# EAGLE board layout_da_pcb_fusion (EAGLE 9.7.0)
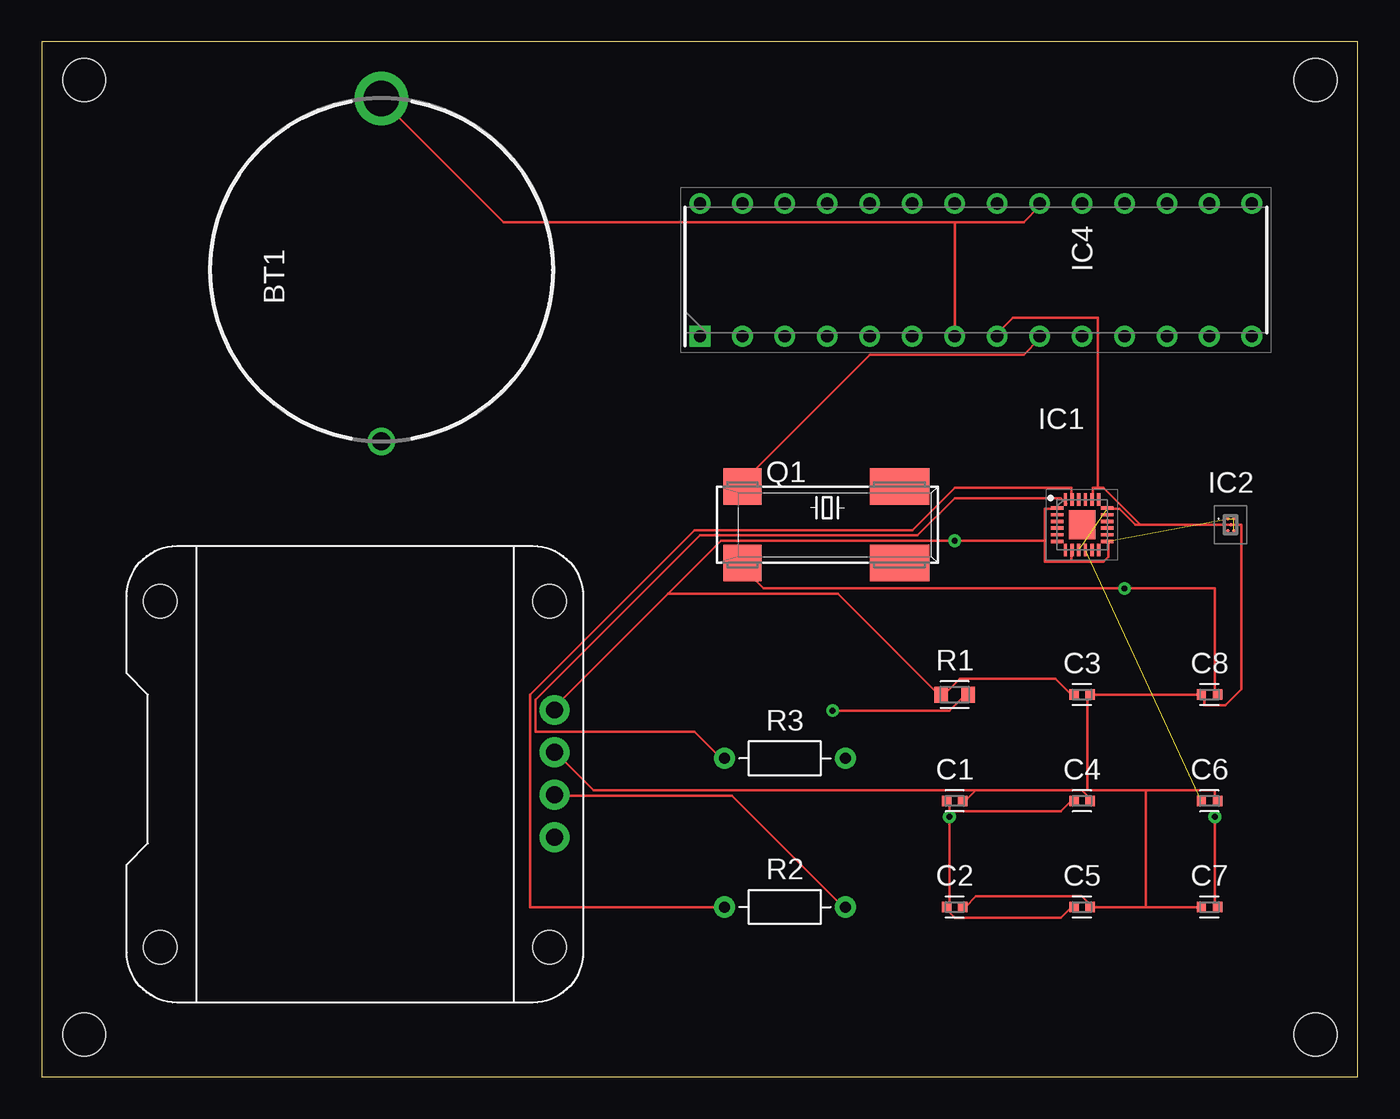
[diagram p0: board, top side]
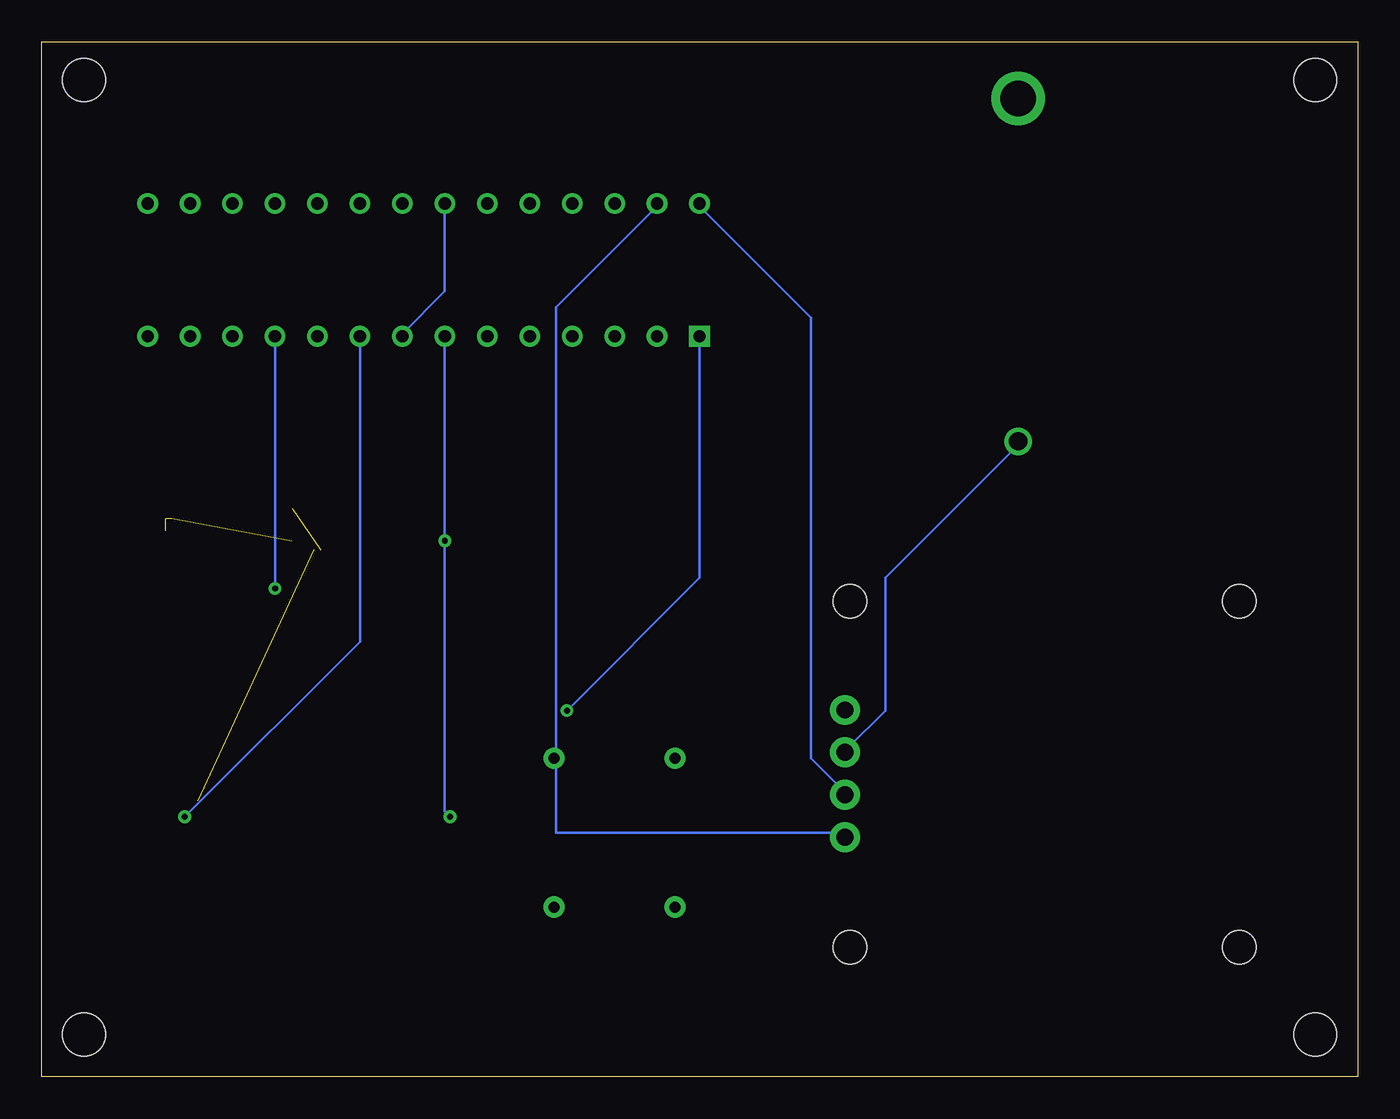
[diagram p1: board, bottom side, seen from below]

Size 78.72 x 61.9 mm. Coordinates in mm from the lower left corner, seen from the top.
Outline: 0,0 78.72,0 78.72,61.9 0,61.9 0,0
Copper layers (1*16): Top 0.035mm / dielectric 1.5mm / Bottom 0.035mm
Design rules "default": minimum track width 6mil, minimum drill 0.35mm, track to track 6mil, track to pad 6mil, pad to pad 6mil, via to via 6mil, smd to smd 6mil, copper to edge 40mil, drill to drill 6mil, minimum pad ring 10mil, minimum via ring 8mil, stop-mask expansion 4mil, vias tented up to drill 0mil, thermal gap 10mil
Holes 2.54 mm at 76.2,59.61 2.54,59.61 2.54,2.54 76.2,2.54

## Footprints (pad centres in the part's own frame; a part is rotated, then mirrored left to right if it is on the bottom)
CR-2032HFN = drill 1.09 pad 1.65: 1 -10.25,0 | drill 2.12 pad 3.2: 2 10.25,0
CAPC1005X60 = smd 0.56 x 0.629: 1 -0.485,0; 2 0.485,0
QFN40P300X300X105-25N = smd 0.75 x 0.2: 1 -1.5,1; 2 -1.5,0.6; 3 -1.5,0.2; 4 -1.5,-0.2; 5 -1.5,-0.6; 6 -1.5,-1; 13 1.5,-1; 14 1.5,-0.6; 15 1.5,-0.2; 16 1.5,0.2; 17 1.5,0.6; 18 1.5,1 | smd 0.2 x 0.75: 7 -1,-1.5; 8 -0.6,-1.5; 9 -0.2,-1.5; 10 0.2,-1.5; 11 0.6,-1.5; 12 1,-1.5; 19 1,1.5; 20 0.6,1.5; 21 0.2,1.5; 22 -0.2,1.5; 23 -0.6,1.5; 24 -1,1.5 | smd 1.59 x 1.75: 25 0,0
TPS7A1030PYKAR = smd 0.2 x 0.2: A1 -0.175,0.35; A3 0.175,0.35; B2 0,0; C1 -0.175,-0.35; C3 0.175,-0.35
DIP794W53P254L3467H457Q28N = drill 0.733 pad 1.133 square: 1 -3.969,16.51 | drill 0.733 pad 1.133: 2 -3.969,13.97; 3 -3.969,11.43; 4 -3.969,8.89; 5 -3.969,6.35; 6 -3.969,3.81; 7 -3.969,1.27; 8 -3.969,-1.27; 9 -3.969,-3.81; 10 -3.969,-6.35; 11 -3.969,-8.89; 12 -3.969,-11.43; 13 -3.969,-13.97; 14 -3.969,-16.51; 15 3.969,-16.51; 16 3.969,-13.97; 17 3.969,-11.43; 18 3.969,-8.89; 19 3.969,-6.35; 20 3.969,-3.81; 21 3.969,-1.27; 22 3.969,1.27; 23 3.969,3.81; 24 3.969,6.35; 25 3.969,8.89; 26 3.969,11.43; 27 3.969,13.97; 28 3.969,16.51
86SMX = smd 2.286 x 2.184: 1 -5.08,-2.286; 4 -5.08,2.286 | smd 3.556 x 2.184: 2 4.318,-2.286; 3 4.318,2.286
RESC1608X60 = smd 0.799 x 0.974: 1 -0.815,0; 2 0.815,0
RESAD724W46L381D178B = drill 0.66 pad 1.26: 1 -3.62,0; 2 3.62,0
OLED_0.96_I2C = drill 1 pad 1.778: GND -1.63,11.63; SCL 0.91,11.63; SDA 3.45,11.63; VCC -4.17,11.63 | hole 2: -10.67,-11.97; 10.03,-11.97; 10.03,11.33; -10.67,11.33

## Placement (x,y rotation side)
BT1  CR-2032_HFN  [CR-2032HFN]  20.32,48.26 90 top
C1  10 µF  [CAPC1005X60]  54.61,16.51 0 top
C2  0.1µF  [CAPC1005X60]  54.61,10.16 0 top
C3  4.7µF  [CAPC1005X60]  62.23,22.86 0 top
C4  0.01µF  [CAPC1005X60]  62.23,16.51 0 top
C5  0.1µF  [CAPC1005X60]  62.23,10.16 0 top
C6  0.1µF  [CAPC1005X60]  69.85,16.51 0 top
C7  22pF  [CAPC1005X60]  69.85,10.16 0 top
C8  22pF  [CAPC1005X60]  69.85,22.86 0 top
IC1  MPU-9250  [QFN40P300X300X105-25N]  62.23,33.02 0 top
IC2  TPS7A1030PYKAR  [TPS7A1030PYKAR]  71.12,33.02 0 top
IC4  ATMEGA328P-PU  [DIP794W53P254L3467H457Q28N]  55.88,48.26 90 top
Q1  16MHz  [86SMX]  46.99,33.02 0 top
R1  10KΩ  [RESC1608X60]  54.61,22.86 0 top
R2  10K  [RESAD724W46L381D178B]  44.45,10.16 0 top
R3  10K  [RESAD724W46L381D178B]  44.45,19.05 0 top
U$1  OLED_0.96_I2C  [OLED_0.96_I2C]  19.05,17.78 270 top

## Library data of the parts
BT1 = CR-2032_HFN; ARROW_PART_NUMBER: CR-2032/HFN; ARROW_PRICE-STOCK: https://www.arrow.com/en/products/cr-2032hfn/panasonic; DESCRIPTION: CR2032/1HF Non rechargeable Li coin cell Panasonic CR2032 3V Lithium Manganese Dioxide Coin Button Battery; HEIGHT: mm; MANUFACTURER_NAME: Panasonic; MANUFACTURER_PART_NUMBER: CR-2032/HFN; MOUSER_PART_NUMBER: 658-CR-2032/HFN; MOUSER_PRICE-STOCK: https://www.mouser.co.uk/ProductDetail/Panasonic-Battery/CR-2032-HFN?qs=w3%252Bcv6FlocpXdsVF%252BYgeww%3D%3D
C1-C8 = Capacitor; CATEGORY: Capacitor
IC1 = MPU-9250; ARROW_PART_NUMBER: MPU-9250; ARROW_PRICE-STOCK: https://www.arrow.com/en/products/mpu-9250/tdk; DESCRIPTION: Accelerometer, Gyroscope, Magnetometer, 3 Axis Sensor IC, SPI Output; HEIGHT: 1.05mm; MANUFACTURER_NAME: TDK; MANUFACTURER_PART_NUMBER: MPU-9250; MOUSER_PART_NUMBER: 410-MPU-9250; MOUSER_PRICE-STOCK: https://www.mouser.co.uk/ProductDetail/TDK-InvenSense/MPU-9250?qs=u4fy%2FsgLU9OhGjFkQSZssA%3D%3D
IC2 = LDO 3.3v; ARROW_PART_NUMBER: TPS7A1030PYKAR; ARROW_PRICE-STOCK: https://www.arrow.com/en/products/tps7a1030pykar/texas-instruments?region=nac; DESCRIPTION: 300-mA low-IQ ultra-low-dropout (LDO) (70 mV at 300 mA) linear regulator; HEIGHT: mm; MANUFACTURER_NAME: Texas Instruments; MANUFACTURER_PART_NUMBER: TPS7A1030PYKAR; MOUSER_PART_NUMBER: 595-TPS7A1030PYKAR; MOUSER_PRICE-STOCK: https://www.mouser.co.uk/ProductDetail/Texas-Instruments/TPS7A1030PYKAR?qs=gTYE2QTfZfS%252BOiFUcXGdIg%3D%3D
IC4 = ATMEGA328P-PU; ARROW_PART_NUMBER: ATMEGA328P-PU; ARROW_PRICE-STOCK: https://www.arrow.com/en/products/atmega328p-pu/microchip-technology?region=nac; DESCRIPTION: MICROCHIP - ATMEGA328P-PU. - MICROCONTROLLER MCU, 8 BIT, ATMEGA, 20MHZ, DIP-28; HEIGHT: 4.572mm; MANUFACTURER_NAME: Microchip; MANUFACTURER_PART_NUMBER: ATMEGA328P-PU; MOUSER_PART_NUMBER: 556-ATMEGA328P-PU; MOUSER_PRICE-STOCK: https://www.mouser.co.uk/ProductDetail/Microchip-Technology-Atmel/ATMEGA328P-PU?qs=K8BHR703ZXguOQv3sKbWcg%3D%3D
Q1 = crystal
R1-R3 = Resistor; CATEGORY: Resistor; SUB-CATEGORY: Fixed
U$1 = oled_autodesk

## Nets
GND: BT1.1 C1.2 C2.2 C3.2 C4.2 C5.2 C6.2 C7.1 C8.1 IC1.9 IC1.18 IC1.20 IC2.B2 IC4.8 IC4.22 U$1.GND
N$2: IC4.27 R3.2 U$1.SDA
N$3: IC4.28 R2.2 U$1.SCL
N$6: IC1.23 R2.1
N$7: IC1.24 R3.1
N$9: C6.1 IC1.10
N$10: IC4.1 R1.2
N$11: C7.2 IC4.9 Q1.4
N$12: C8.2 IC4.11 Q1.1
VCC: BT1.2 C1.1 C2.1 C3.1 C4.1 C5.1 IC1.1 IC1.8 IC1.13 IC2.A1 IC2.A3 IC2.C3 IC4.7 IC4.20 R1.1 U$1.VCC

## Tracks (layer width: path | path; a pad name or v marks a point on that pad's centre or on a via)
GND  (1 unrouted)
  Top 0.152: 62.87,10.16 62.23,10.8 55.88,10.8 55.24,10.16 C2.2 | 62.87,10.16 66.04,10.16 | 66.04,10.16 C7.1 | 62.87,10.16 C5.2 | 55.88,17.14 55.24,16.51 C1.2 | 62.23,17.14 55.88,17.14 | 62.23,17.14 62.87,16.51 C4.2 | 62.55,17.14 62.55,22.86 C3.2 C8.1 69.53,22.86 69.53,22.23 70.8,22.23 71.75,23.18 71.75,33.02 IC2.B2 65.72,33.02 | 62.23,17.14 62.55,17.14 | 62.55,17.14 66.04,17.14 | 66.04,17.14 70.17,17.14 70.17,16.51 C6.2 | 66.04,17.14 66.04,10.16 | 65.72,33.02 65.41,33.02 64.45,33.97 63.82,33.97 IC1.18 | 63.18,35.24 63.5,35.24 65.72,33.02 | 63.18,35.24 62.87,35.24 62.87,34.61 IC1.20 | 63.18,35.24 63.18,45.4 58.1,45.4 57.15,44.45 IC4.8 | 55.88,17.14 33.02,17.14 30.8,19.37 U$1.GND
  Bottom 0.152: BT1.1 20.32,37.78 28.26,29.84 28.26,21.91 30.48,19.68 U$1.GND | IC4.22 54.61,46.99 57.15,44.45 IC4.8
N$2
  Bottom 0.152: 47.94,19.05 47.94,46.04 41.91,52.07 IC4.27 | 47.94,19.05 47.94,14.6 30.8,14.6 U$1.SDA | 47.94,19.05 R3.2
N$3
  Top 0.152: R2.2 47.94,10.16 41.27,16.83 30.8,16.83 U$1.SCL
  Bottom 0.152: IC4.28 39.37,52.07 32.7,45.4 32.7,19.05 30.8,17.14 U$1.SCL
N$6
  Top 0.152: R2.1 29.21,10.16 29.21,22.86 39.05,32.7 52.07,32.7 54.61,35.24 61.59,35.24 61.59,34.61 IC1.23
N$7
  Top 0.152: IC1.24 61.28,34.29 60.96,34.61 54.61,34.61 52.39,32.38 39.37,32.38 29.53,22.54 29.53,20.64 39.05,20.64 40.64,19.05 R3.1
N$9  (1 unrouted)
N$10  (via drill 0.35)
  Top 0.152: v47.31,21.91 54.29,21.91 55.24,22.86 R1.2
  Bottom 0.152: v47.31,21.91 39.37,29.84 IC4.1
N$11  (via drill 0.35)
  Top 0.152: v70.17,15.56 70.17,10.16 C7.2 | Q1.4 41.91,35.56 49.53,43.18 58.74,43.18 59.69,44.13 IC4.9
  Bottom 0.152: v70.17,15.56 59.69,26.04 IC4.9
N$12  (via drill 0.35)
  Top 0.152: C8.2 70.17,22.86 70.17,29.21 v64.77,29.21 43.18,29.21 41.91,30.48 Q1.1
  Bottom 0.152: v64.77,29.21 IC4.11
VCC  (via drill 0.35)  (3 unrouted)
  Top 0.152: C3.1 61.59,22.86 60.64,23.81 54.93,23.81 53.98,22.86 R1.1 53.66,22.86 47.62,28.89 37.47,28.89 | 61.59,30.8 61.59,31.43 IC1.8 | 61.59,30.8 63.5,30.8 63.82,31.12 63.82,32.07 IC1.13 | 60.01,32.07 60.01,30.8 61.59,30.8 | 60.01,32.07 60.01,33.97 60.64,33.97 IC1.1 | 60.01,32.07 v54.61,32.07 40.64,32.07 37.47,28.89 | 37.47,28.89 30.8,22.23 U$1.VCC | 54.29,15.88 54.29,16.51 C1.1 | 54.29,15.88 v54.29,15.56 54.29,10.16 C2.1 53.98,10.16 54.61,9.52 60.96,9.52 61.59,10.16 C5.1 | 54.29,15.88 60.96,15.88 61.59,16.51 C4.1 | 54.61,51.12 IC4.7 | 54.61,51.12 58.74,51.12 59.69,52.07 IC4.20 | 54.61,51.12 27.62,51.12 20.32,58.42 BT1.2
  Bottom 0.152: v54.29,15.56 54.61,15.88 v54.61,32.07 IC4.7